# Altium PCB LoRa.PcbDoc
Units mm, origin at the board's own origin, x right, y up, seen from the top; angles counter-clockwise.
Board outline 58.03 x 58.03 mm, 2 copper layers (Top Layer, Bottom Layer); 2 components, 35 nets, 18 pads, 0 vias.
Unrouted connection lines stored in the file: 1.
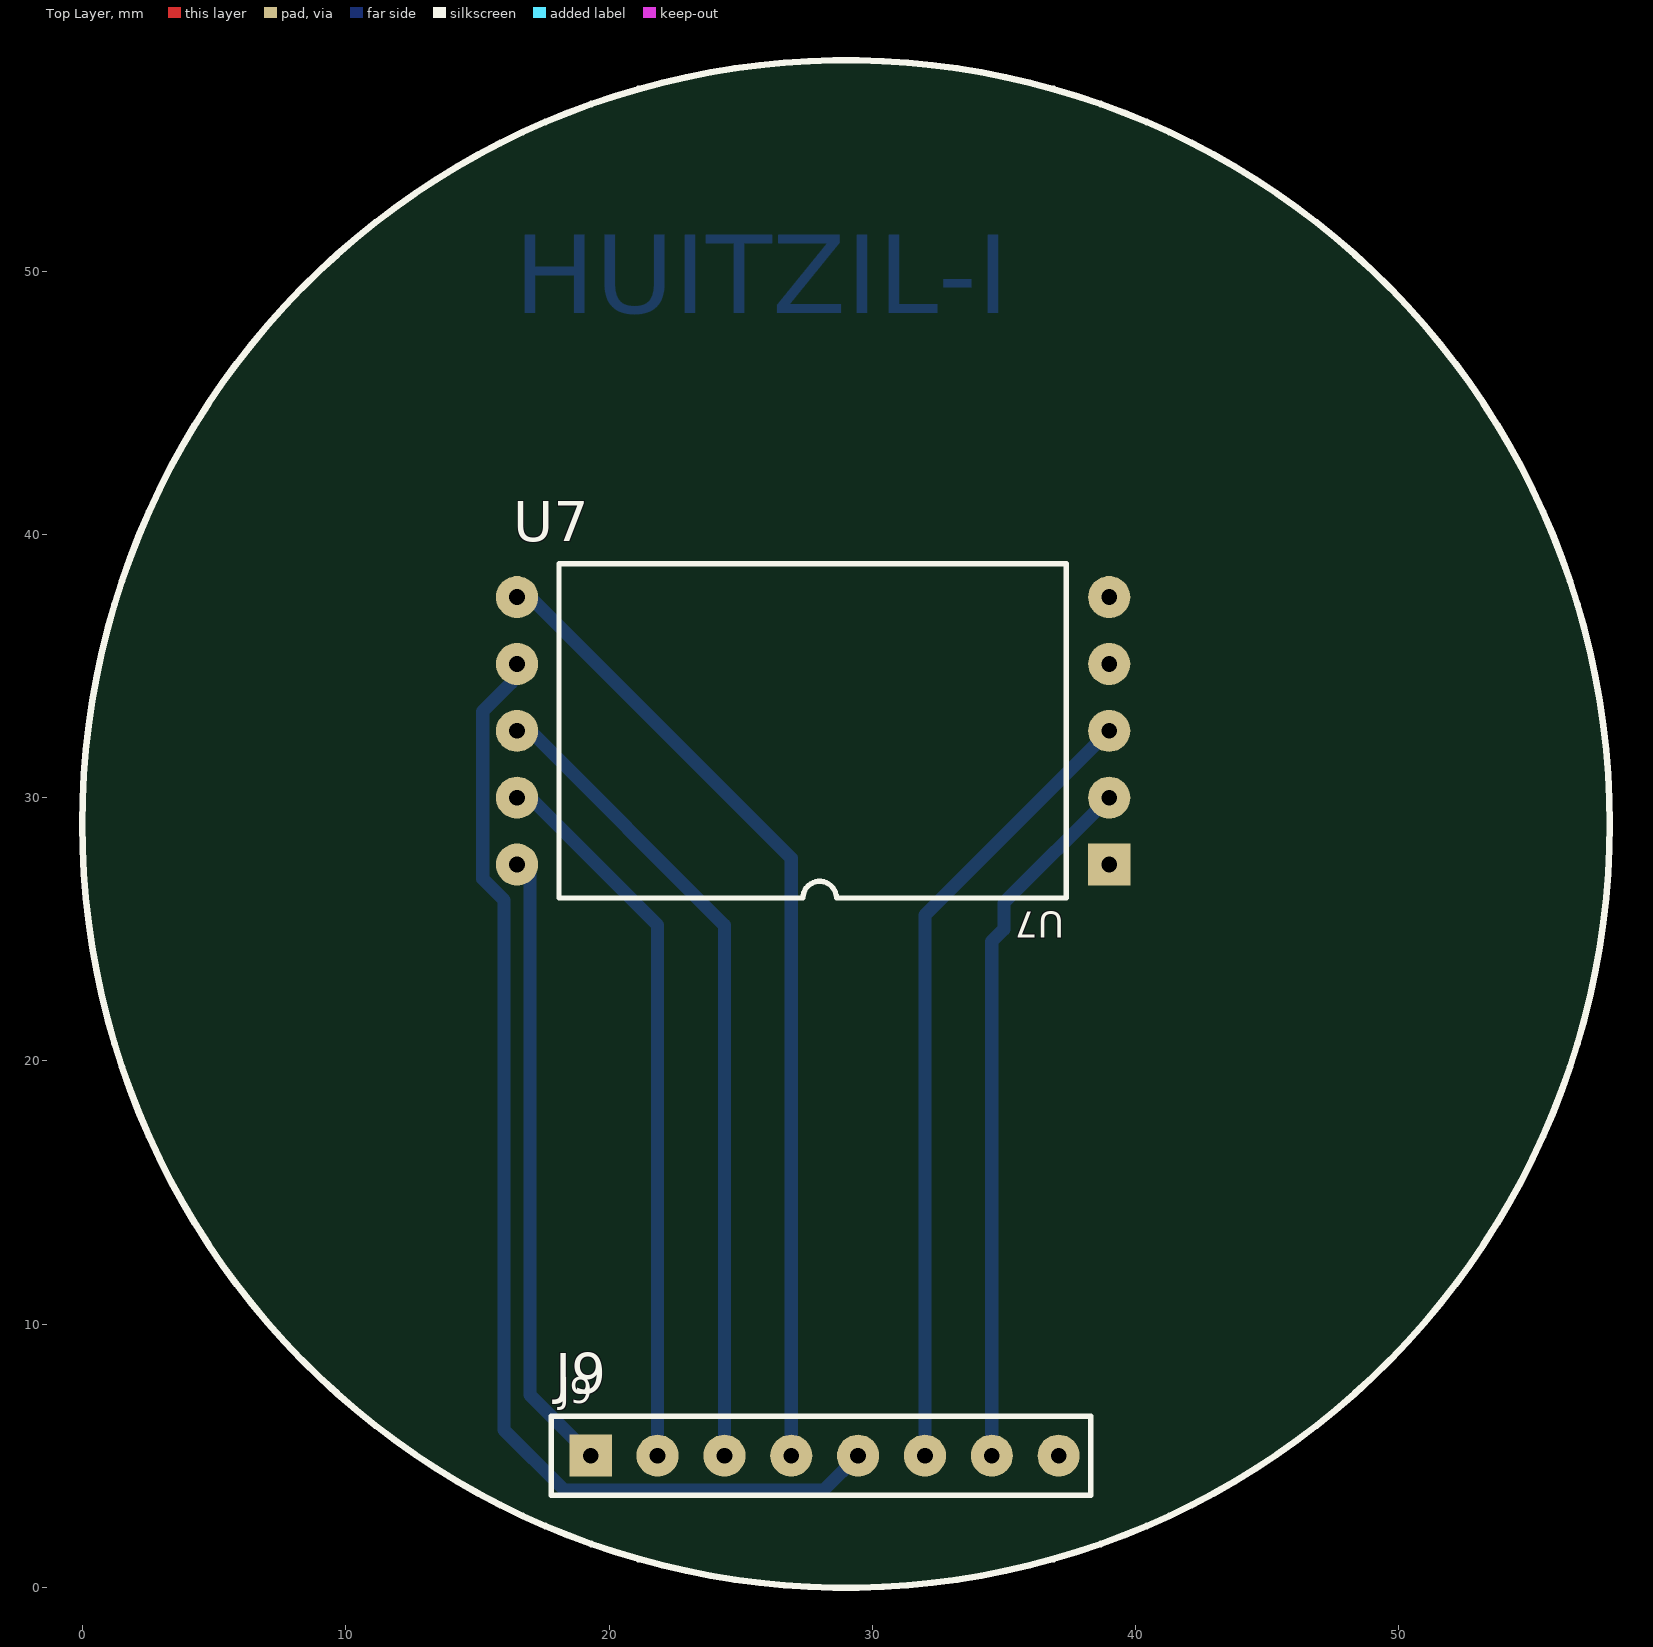
[diagram p0: Top Layer view]
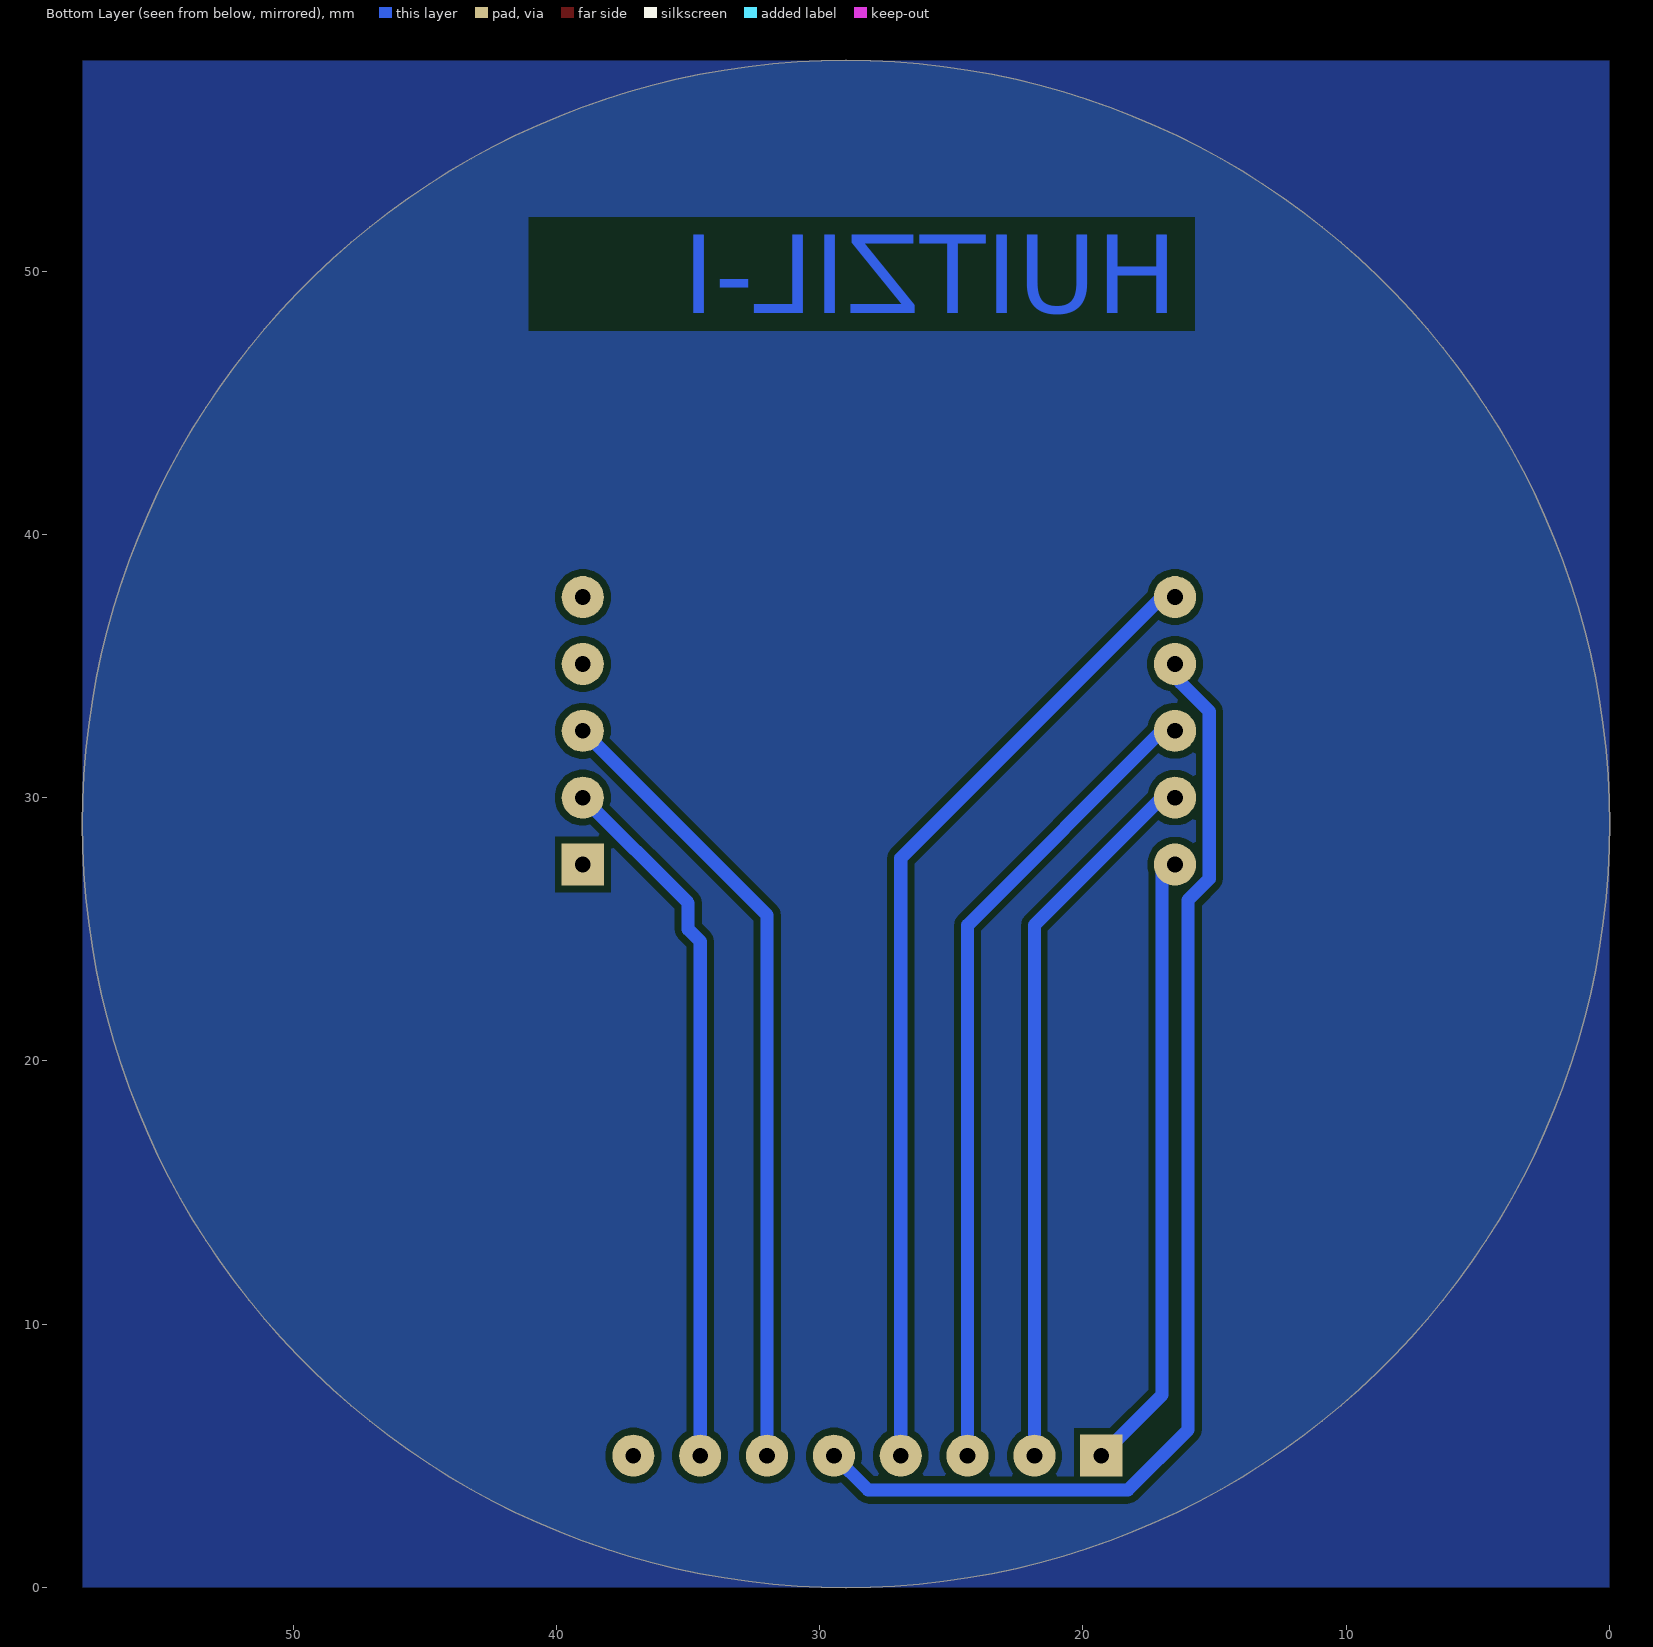
[diagram p1: Bottom Layer view, seen from below]

## Layer stack, top to bottom
Top Solder: solder mask 0.0102, Solder Resist, Dk 3.5
Top Layer: signal copper 0.0356
Dielectric 1: dielectric 0.32, FR-4, Dk 4.8
Bottom Layer: signal copper 0.0356
Bottom Solder: solder mask 0.0102, Solder Resist, Dk 3.5

## Board outline
29,-0.017 cw(c29,29) -0.017,29 cw(c29,29) 29,58.017 cw(c29,29) 58.017,29 cw(c29,29)

## Design rules (kind name [scope] priority, off if disabled: settings)
Clearance [All] p1: gap=0.254 ignorepadtopadclearanceinfootprint=FALSE except(0: Arc-Hole Track-Hole SMDPad-Hole THPad-Hole Via-Hole Fill-Hole Poly-Hole Region-Hole Text-Hole)
PolygonConnect [All] p1: connectstyle=Relief reliefconductorwidth=0.254 reliefentries=4 polygonreliefangle="90 Angle" airgapwidth=0.254
RoutingVias [All] p1: holewidth=0.711 width=1.27 viastyle="Through Hole" minholewidth=0.711 minwidth=1.27 maxholewidth=0.711 maxwidth=1.27
SolderMaskExpansion [All] p1: expansion=0.102 istentingtop=FALSE
Width [All] p1: maxlimit=0.5 minlimit=0.5 preferedwidth=0.5
30 further rules are at their usual default settings.

## Components (designator, comment, footprint, x,y, rotation, side; value= is the part's Value field where it differs from the comment)
J9 "8x1 CONN" CONN8x1_2.54 19.3,5 r90 top
U7 "RFM95W" "BLUEE LORA" 39,27.46 r180 top

## Footprints (in the part's own frame and the unit in brackets; to place one, negate y for a bottom-side part, rotate by r counter-clockwise, add the part's x,y. Pads: shape width x height; smd on the part's side, far side on the other; paste and mask are expansions set on the pad)
"BLUEE LORA" [mm]
  rect 1.6x1.6 hole 0.6: 1(0,0)
  round 1.6 hole 0.6: 2(0,-2.54) 3(0,-5.08) 4(0,-7.62) 5(0,-10.16) 6(22.5,0) 7(22.5,-2.54) 8(22.5,-5.08) 9(22.5,-7.62) 10(22.5,-10.16)
  silkscreen extent 1.63,-11.43 20.9,1.27
CONN8x1_2.54 [mm]
  rect 1.6x1.6 hole 0.6: 1(0,0)
  round 1.6 hole 0.6: 2(0,-2.54) 3(0,-5.08) 4(0,-7.62) 5(0,-10.16) 6(0,-12.7) 7(0,-15.24) 8(0,-17.78)
  silkscreen extent -1.5,-19 1.5,1.5, body extent -1.2,-18.96 1.2,1.36, height 8.2

## Part data
J9: library part "CONN 8x1", "THT 8x1 2.54mm CONN"
U7: library part RMF95W, "915 MHz LoRa Transceiver"

## Nets (pads, with @x,y where several pads share a name; then routed paths per layer and width w, separated by ;. In a path a pad name is that pad's centre, name@x,y a point inside that pad or via, vN(x,y) a via of type N, cw(c..) or ccw(c..) an arc to the next point about the centre after c; other vN are vias at no path point)
3V3: 
3V3a: 
3V3b: 
3V3c: J9.7 U7.2 | length 26.8
  Bottom Layer w0.5: J9.7 34.54,24.54 35,25 35,26 U7.2
32: 
CK: J9.3 U7.8 | length 30.6
  Bottom Layer w0.5: U7.8@17,32.54 24.38,25.16 J9.3
DHT11: 
GND: 
GNDa: 
GNDb: 
GNDc: J9.8 U7.1
IO0: J9.6 U7.3 | length 30.4
  Bottom Layer w0.5: J9.6 32,25.54 U7.3
LED: 
LoRacs: 
LoRaDIO0: 
LoRarst: 
MI: J9.4 U7.10 | length 36.7
  Bottom Layer w0.5: U7.10@17,37.62 26.92,27.7 J9.4
MISO: 
MO: J9.5 U7.9 | length 45.2
  Bottom Layer w0.5: U7.9@17,35.08 16.798,35.08 16.29,34.572 16.29,34.37 15.196,33.276 15.196,26.92 16,26.116 16,5.987 18.291,3.696 28.156,3.696 J9.5
MOSI: 
NetB1_2: 
NetC1_2: 
NetC2_2: 
NetC3_1: 
NetD1_1: 
NetD2_2: 
NetR1_2: 
NetR4_2: 
RST: J9.1 U7.6 | length 23.4
  Bottom Layer w0.5: U7.6@17,27.46 17,7.3 J9.1
SCK: 
SCL: 
SCLa: 
SDA: 
SDAa: 
SS: J9.2 U7.7 | length 27
  Bottom Layer w0.5: U7.7@17,30 21.84,25.16 J9.2
pads on no net: U7.4 U7.5

## Polygon pours and split planes (outlines as drawn)
GNDb on Bottom Layer "GNDB_L02_P001" (solid, pour order 1): 0,58 58,58 58,0 0,0

## Other copper
Bottom Layer:
  text "HUITZIL-I" at 16.4,48.4 h3

## Silkscreen, mask and mechanical layers (free items; w line width, h text height)
Top Overlay:
  circle w0.254: c29,29 r29.017